# Altium PCB Main.PcbDoc
Units mm, origin at the board's own origin, x right, y up, seen from the top; angles counter-clockwise.
Board outline 60 x 54 mm, 2 copper layers (Top Layer, Bottom Layer); 5 components, 2 nets, 10 pads, 0 vias.
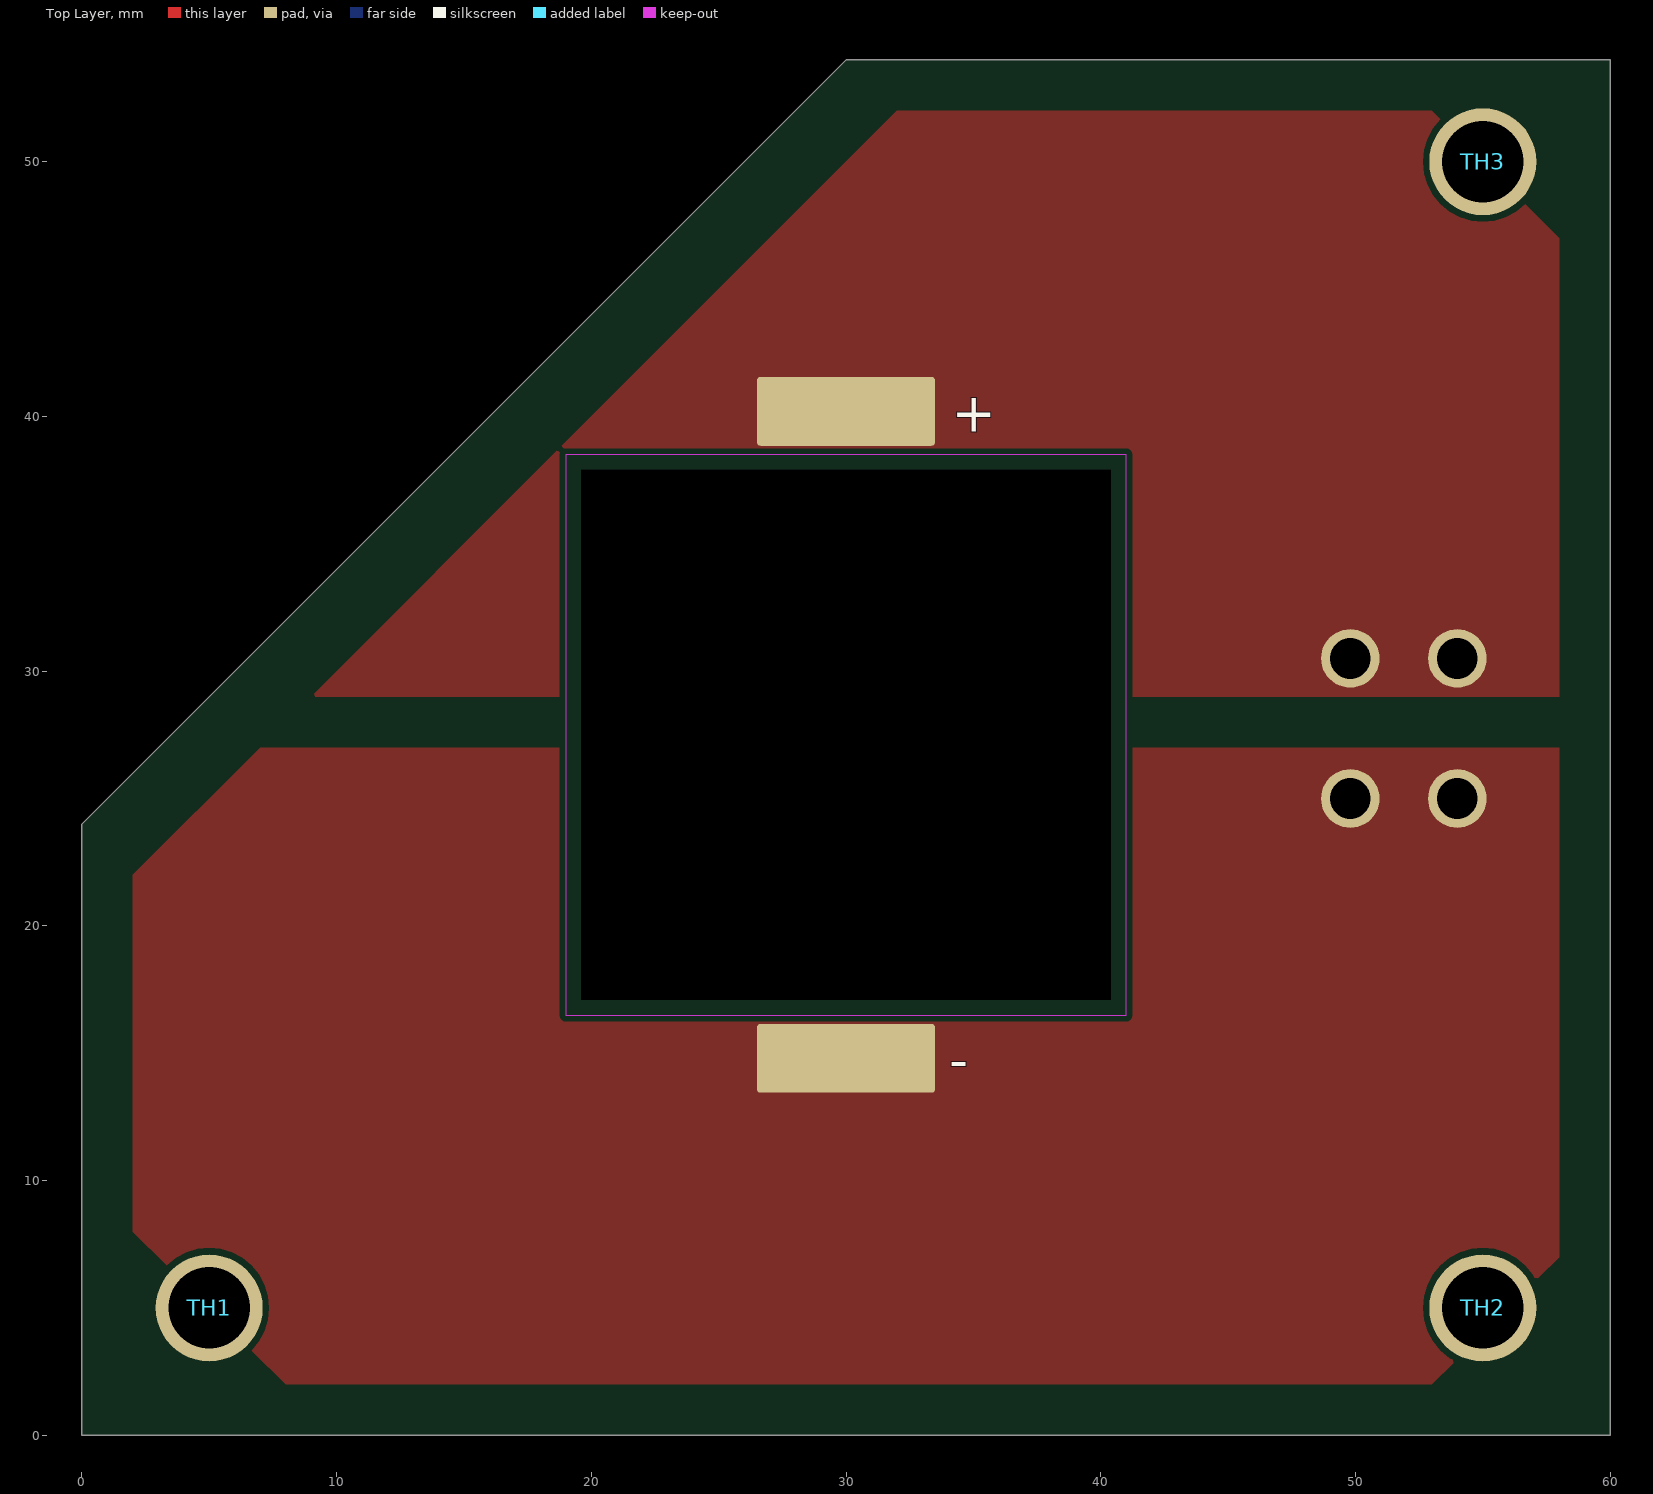
[diagram p0: Top Layer view]
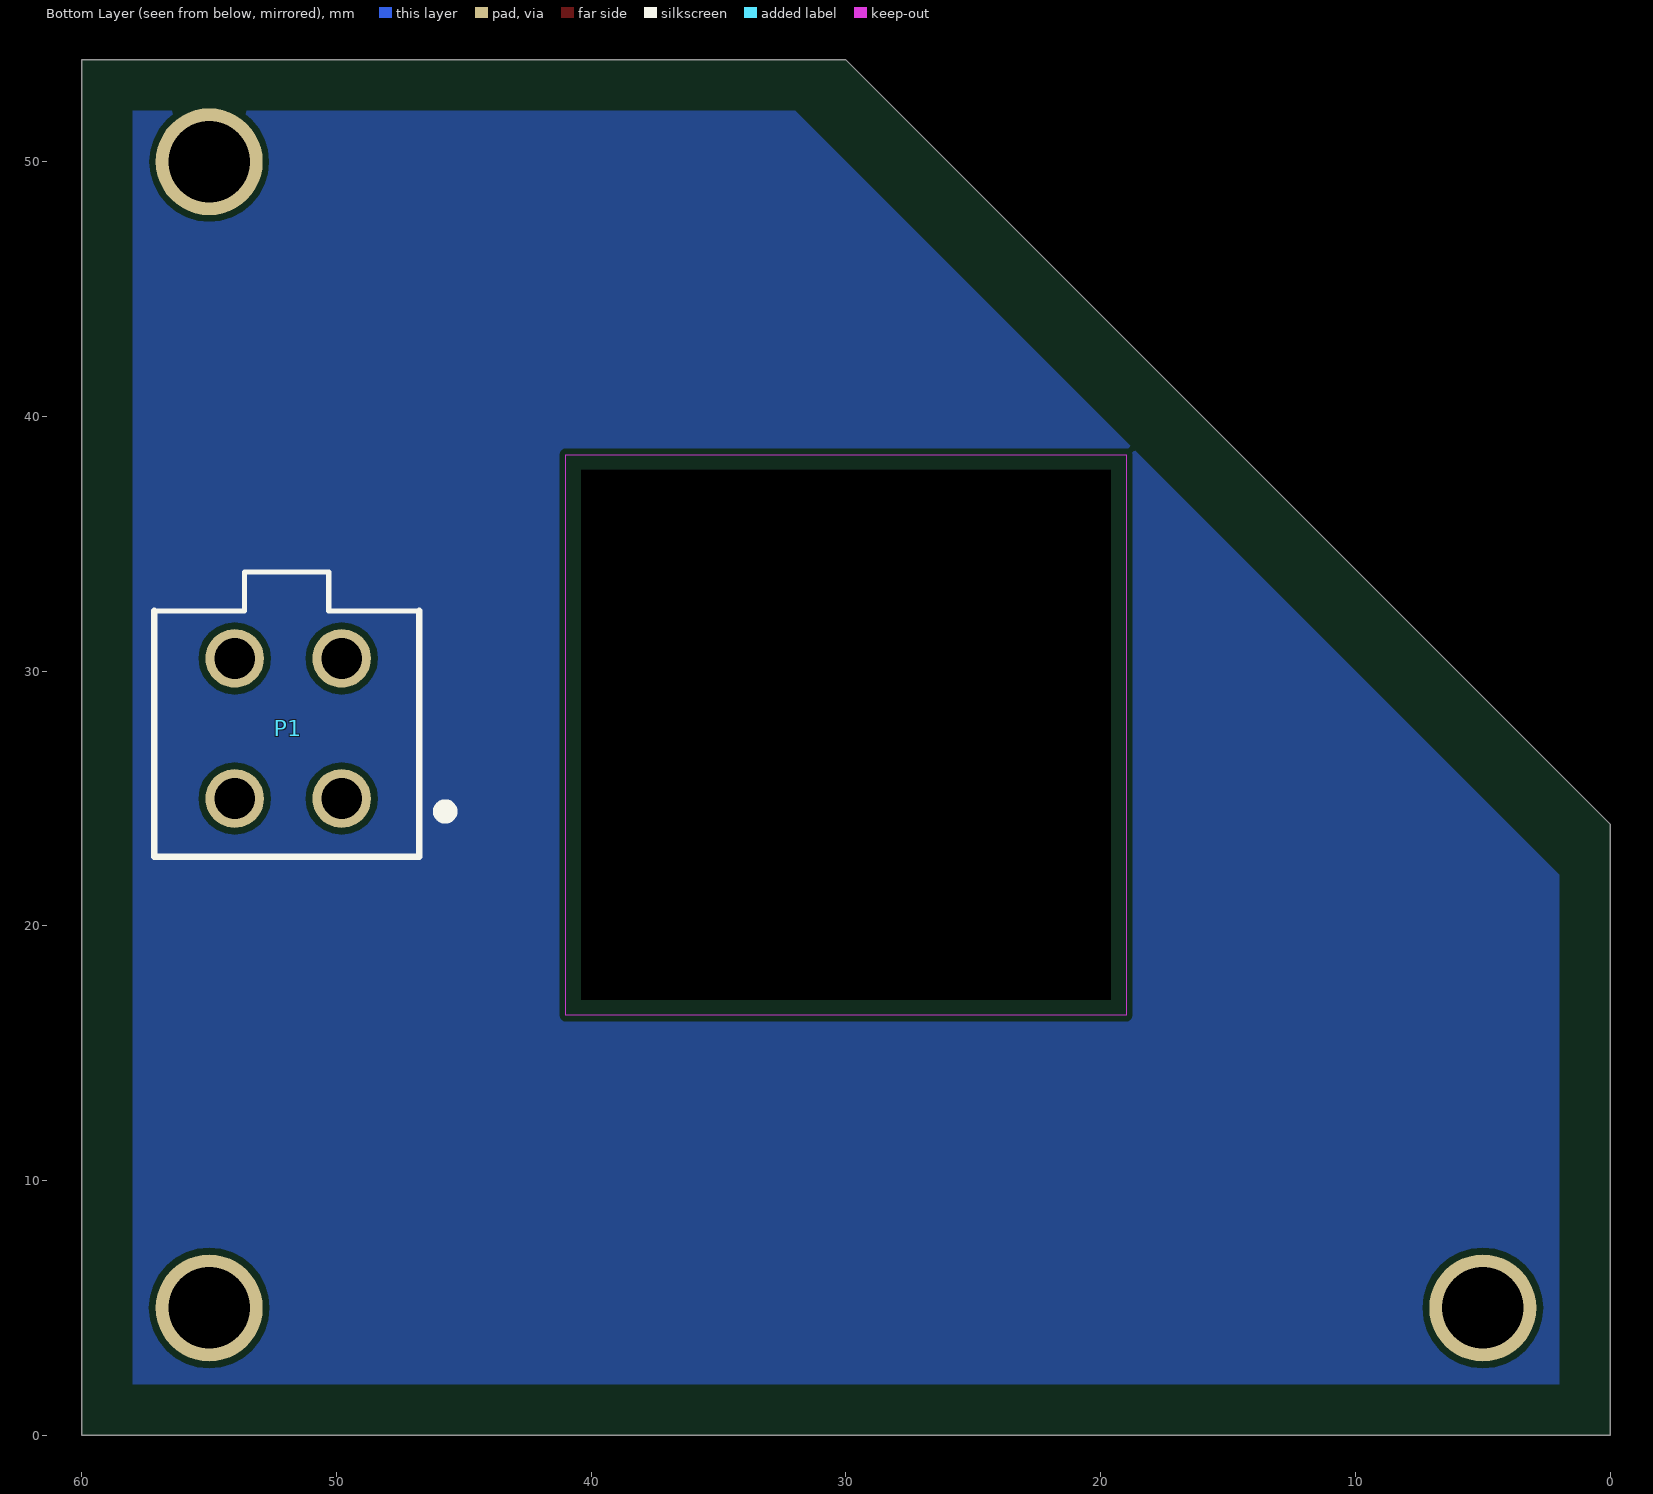
[diagram p1: Bottom Layer view, seen from below]

## Layer stack, top to bottom
Top Solder: solder mask 0.0102, Solder Resist, Dk 3.5
Top Layer: signal copper 0.0356
Dielectric 1: dielectric 0.32, FR-4, Dk 4.8
Bottom Layer: signal copper 0.0356
Bottom Solder: solder mask 0.0102, Solder Resist, Dk 3.5

## Board outline
60,54 60,0 0,0 0,24 30,54

## Design rules (kind name [scope] priority, off if disabled: settings)
Clearance [All] p1: gap=0.254 ignorepadtopadclearanceinfootprint=FALSE except(0: Arc-Hole Track-Hole SMDPad-Hole THPad-Hole Via-Hole Fill-Hole Poly-Hole Region-Hole Text-Hole)
PolygonConnect [All] p1: connectstyle=Relief reliefconductorwidth=0.254 reliefentries=4 polygonreliefangle="90 Angle" airgapwidth=0.254
RoutingVias [All] p1: holewidth=0.711 width=1.27 viastyle="Through Hole" minholewidth=0.711 minwidth=1.27 maxholewidth=0.711 maxwidth=1.27
SolderMaskExpansion [All] p1: expansion=0.102 istentingtop=FALSE
Width [All] p1: maxlimit=0.254 minlimit=0.254 preferedwidth=0.254
30 further rules are at their usual default settings.

## Classes and differential pairs
component class Main: P1 TH1 TH2 TH3

## Components (designator, comment, footprint, x,y, rotation, side; value= is the part's Value field where it differs from the comment)
LED_1 "10W_RoyalBlue_LED" 10W_LED_200200 30,27.5 r0 top
P1 "Mini-Fit Jr 4 Pos" "MOLEX 0039281043" 49.8,25 r0 bottom
TH1 "m3 screw" m3screw#1 5,5 r0 top
TH2 "m3 screw" m3screw#2 95,5 r0 top
TH3 "m3 screw" m3screw#3 50,50 r0 top

## Footprints (in the part's own frame and the unit in brackets; to place one, negate y for a bottom-side part, rotate by r counter-clockwise, add the part's x,y. Pads: shape width x height; smd on the part's side, far side on the other; paste and mask are expansions set on the pad)
10W_LED_200200 [mm]
  rect 20x0 hole 20.8 square unplated mask+0: 0(0,0)
  rrect10% 7x2.7 smd: 1(0,12.7) 2(0,-12.7)
  Keep-Out Layer region: -11,-11 11,-11 11,11 -11,11
m3screw#1 [mm]
  round 4.2 hole 3.2: 0(0,0)
m3screw#2 [mm]
  round 4.2 hole 3.2: 0(-40,0)
m3screw#3 [mm]
  round 4.2 hole 3.2: 0(5,0)
"MOLEX 0039281043" [mm] "Connector Header Through Hole 4 position 0.165\" (4.20mm)"
  round 2.3 hole 1.6: 1(0,0) 2(4.2,0) 3(0,-5.5) 4(4.2,-5.5)
  silkscreen extent -4.24,-8.89 7.37,2.29, body extent -3.07,-8.82 7.33,2.18, height 12.8

## Part data
LED_1: "445nm LED"
P1: library part "Molex 0039281043", "Mini-Fit Jr. Header, Dual Row, Right-Angle, with Snap-in Plastic Peg PCB Lock, 6 Circuits, PA Polyamide Nylon 6/6 94V-2, 0.76µm Select Gold (Au) Plating"

## Nets (pads, with @x,y where several pads share a name; then routed paths per layer and width w, separated by ;. In a path a pad name is that pad's centre, name@x,y a point inside that pad or via, vN(x,y) a via of type N, cw(c..) or ccw(c..) an arc to the next point about the centre after c; other vN are vias at no path point)
GND: LED_1.1 P1.3 P1.4
VDD: LED_1.2 P1.1 P1.2
pads on no net: LED_1.0 TH1.0 TH2.0 TH3.0

## Polygon pours and split planes (outlines as drawn)
VDD on Top Layer "VDD_L01_P001" (solid, pour order 1): 7,27 2,22 2,8 8,2 53,2 58,7 58,27
GND on Top Layer "GND_L01_P000" (solid, pour order 0): 58,29 9,29 32,52 53,52 58,47
no net on Bottom Layer "NONET_L02_P002" (solid, pour order 2): 2,22 3,23 32,52 58,52 58,2 2,2

## Text inside footprints (layer, text, board x,y; h text height)
LED_1: Top Overlay "+" at 34.154,39.4 h1.52; Top Overlay "-" at 34.054,13.992 h1.52